# EAGLE board test4 (EAGLE 9.5.1)
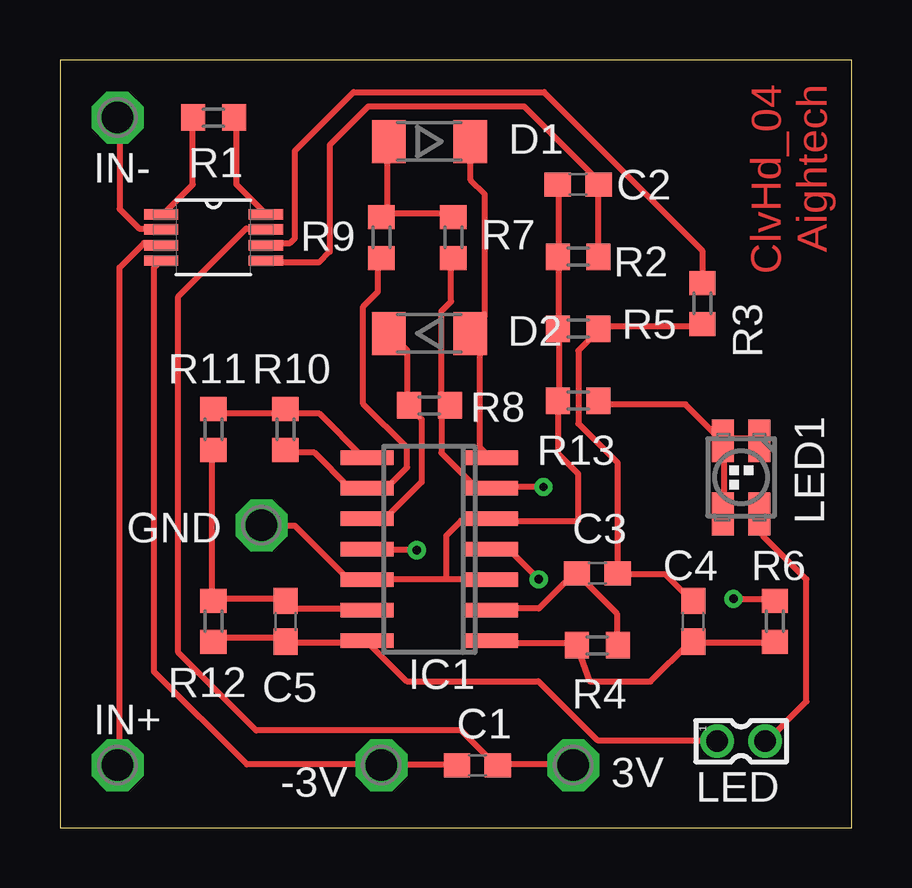
[diagram p0: board, top side]
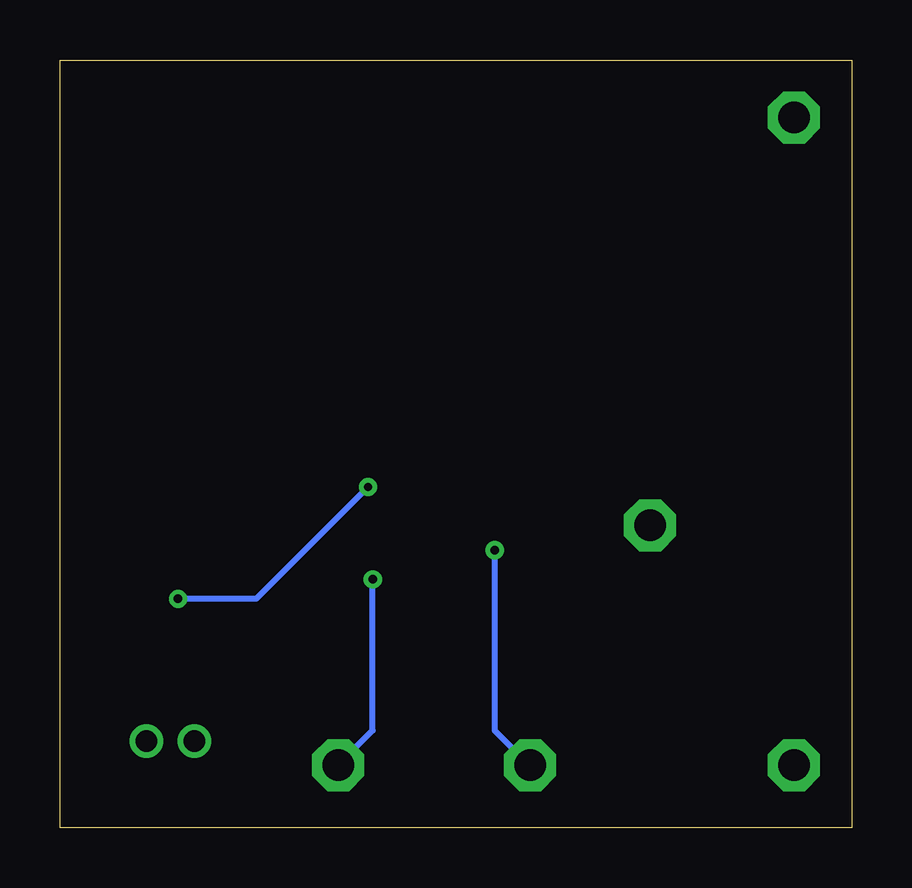
[diagram p1: board, bottom side, seen from below]

Size 33 x 32 mm. Coordinates in mm from the lower left corner, seen from the top.
Outline: 0,0 33,0 33,32 0,32 0,0
Copper layers (1*16): Top 0.035mm / dielectric 1.5mm / Bottom 0.035mm
Design rules "default *": minimum track width 10mil, minimum drill 0.35mm, track to track 6mil, track to pad 8mil, pad to pad 6mil, via to via 6mil, smd to smd 6mil, copper to edge 40mil, drill to drill 6mil, minimum pad ring 10mil, minimum via ring 8mil, stop-mask expansion 4mil, vias tented up to drill 0mil, thermal gap 10mil

## Footprints (pad centres in the part's own frame; a part is rotated, then mirrored left to right if it is on the bottom)
P1-13 = drill 1.321 pad 2.159 octagon: TP 0,0
C0603 = smd 1.1 x 1: 1 -0.85,0; 2 0.85,0
SOD80 = smd 1.4 x 1.8: 1 -1.7,0; 2 1.7,0
SO14 = smd 0.6 x 2.2: 1 -3.81,-2.6; 2 -2.54,-2.6; 3 -1.27,-2.6; 4 0,-2.6; 5 1.27,-2.6; 6 2.54,-2.6; 7 3.81,-2.6; 8 3.81,2.6; 9 2.54,2.6; 10 1.27,2.6; 11 0,2.6; 12 -1.27,2.6; 13 -2.54,2.6; 14 -3.81,2.6
332-02 = drill 0.9 pad 1.27: 1 0,-1; 2 0,1
P-LCC-4-3 = smd 0.914 x 1.778: 1 -0.762,-1.524; 2 -0.762,1.524; 3 0.762,1.524; 4 0.762,-1.524
SOP65P490X110-8N = smd 1.422 x 0.432: 1 -2.184,0.965; 2 -2.184,0.33; 3 -2.184,-0.33; 4 -2.184,-0.965; 5 2.184,-0.965; 6 2.184,-0.33; 7 2.184,0.33; 8 2.184,0.965
R0603 = smd 1 x 1.1: 1 -0.85,0; 2 0.85,0

## Placement (x,y rotation side)
3V  PTR1PAD1-13  [P1-13]  21.4,2.6 0 top
-3V  PTR1PAD1-13  [P1-13]  13.4,2.6 0 top
C1  0.1nF  [C0603]  17.4,2.6 180 top
C2  1nF  [C0603]  21.6,26.8 0 top
C3  0.1nF  [C0603]  22.4,10.6 0 top
C4  0.1nF  [C0603]  26.4,8.6 90 top
C5  0.1nF  [C0603]  9.4,8.6 270 top
D1  [SOD80]  15.4,28.6 180 top
D2  [SOD80]  15.4,20.6 0 top
GND  PTR1PAD1-13  [P1-13]  8.4,12.6 0 top
IC1  LMV324M  [SO14]  15.4,11.6 90 top
IN+  PTR1PAD1-13  [P1-13]  2.4,2.6 0 top
IN-  PTR1PAD1-13  [P1-13]  2.4,29.6 0 top
LED  332-02  [332-02]  28.4,3.6 270 top
LED1  [P-LCC-4-3]  28.4,14.6 180 top
PRECI_AMP  INA326  [SOP65P490X110-8N]  6.4,24.6 0 top
R1  100k  [R0603]  6.4,29.6 180 top
R2  100k  [R0603]  21.6,23.8 0 top
R3  100k  [R0603]  26.78,21.85 270 top
R4  100k  [R0603]  22.4,7.6 180 top
R5  100k  [R0603]  21.6,20.8 180 top
R6  100k  [R0603]  29.8,8.6 90 top
R7  100k  [R0603]  16.4,24.6 90 top
R8  100k  [R0603]  15.4,17.6 180 top
R9  100k  [R0603]  13.4,24.6 270 top
R10  100k  [R0603]  9.4,16.6 90 top
R11  100k  [R0603]  6.4,16.6 270 top
R12  100k  [R0603]  6.4,8.6 270 top
R13  100k  [R0603]  21.6,17.8 0 top

## Library data of the parts
3V -3V GND IN+ IN- = testpad
C1-C5 = rcl; SPICEPREFIX: C
D1 D2 = semicon-smd-ipc
IC1 = linear; SPICEPREFIX: J
LED = con-garry
LED1 = led
PRECI_AMP = INA326EA_250; DESCRIPTION: Precision, Low Drift, CMOS Instrumentation Amplifier 8-VSSOP -40 to 85; DIGI-KEY_PART_NUMBER: 296-15312-1-ND; DIGI-KEY_PURCHASE_URL: https://www.digikey.com/product-detail/en/texas-instruments/INA326EA-250/296-15312-1-ND/568254?utm_source=snapeda&utm_medium=aggregator&utm_campaign=symbol; MF: Texas Instruments; MP: INA326; PACKAGE: MSOP-8 Texas Instruments
R1-R13 = rcl; SPICEPREFIX: R

## Nets
GNDA: C2.1 GND.TP IC1.3 IC1.5 IC1.12 R2.1 R5.2 R13.1
N$1: PRECI_AMP.1 R1.2
N$2: PRECI_AMP.8 R1.1
N$3: IN+.TP PRECI_AMP.3
N$4: C2.2 PRECI_AMP.5 R2.2
N$5: IN-.TP PRECI_AMP.2
N$6: C3.1 IC1.2 R4.1
N$7: C3.2 C4.2 R3.2 R5.1
N$8: C5.1 IC1.13 R11.2 R12.1
N$9: PRECI_AMP.6 R3.1
N$10: IC1.6 R6.2 R7.1 R8.1
N$11: D2.1 IC1.10 R8.2
N$12: IC1.9 R9.2 R10.1
N$13: D1.1 D2.2 IC1.7
N$14: D1.2 R7.2 R9.1
N$15: IC1.8 R10.2 R11.1
N$16: C5.2 IC1.14 LED.1 R12.2
N$17: LED1.1 LED1.3 LED1.4 R13.2
N$20: LED1.2 LED.2
N$23: C4.1 IC1.1 R4.2 R6.1
V+: 3V.TP C1.1 IC1.4 PRECI_AMP.7
V-: -3V.TP C1.2 IC1.11 PRECI_AMP.4

## Tracks (layer width: path | path; a pad name or v marks a point on that pad's centre or on a via)
GNDA
  Top 0.254: C2.1 20.8,26.79 20.8,23.94 R2.1 20.8,23.74 20.8,20.89 R5.2 20.8,20.69 20.8,17.85 R13.1 20.75,15.6 21.6,14.75 21.6,12.79 18.13,12.79 IC1.5 17.93,12.79 16.72,12.79 16.11,12.17 16.11,10.35 | 16.11,10.35 17.93,10.35 IC1.3 | 16.11,10.35 12.85,10.35 IC1.12 12.64,10.35 12.04,10.35 9.8,12.58 8.58,12.58 GND.TP
N$1
  Top 0.254: R1.2 5.53,29.45 5.53,26.81 4.31,25.59 PRECI_AMP.1
N$2
  Top 0.254: R1.1 7.36,29.45 7.36,26.81 8.58,25.59 PRECI_AMP.8
N$3
  Top 0.254: PRECI_AMP.3 4.11,24.37 3.5,24.37 2.48,23.35 2.48,2.63 IN+.TP
N$4
  Top 0.254: R2.2 22.43,23.94 22.43,26.79 C2.2 22.43,26.99 19.36,30.05 12.85,30.05 11.24,28.45 11.24,24.01 10.79,23.55 8.78,23.55 PRECI_AMP.5
N$5
  Top 0.254: PRECI_AMP.2 4.11,24.98 3.3,24.98 2.48,25.79 2.48,29.45 IN-.TP
N$6
  Top 0.254: R4.1 23.21,7.71 23.21,8.93 21.59,10.55 C3.1 21.38,10.55 19.96,9.13 18.13,9.13 IC1.2
N$7
  Top 0.254: C4.2 26.26,9.53 25.24,10.55 23.41,10.55 C3.2 23.25,15.2 21.61,16.84 21.61,19.88 22.43,20.69 R5.1 22.63,20.89 26.87,20.89 R3.2
N$8
  Top 0.254: R11.2 6.35,15.63 6.35,9.53 R12.1 6.55,9.53 9.39,9.53 C5.1 9.6,9.33 9.8,9.13 12.64,9.13 IC1.13
N$9
  Top 0.254: R3.1 26.78,24.06 20.18,30.66 12.24,30.66 9.8,28.22 9.8,24.57 9.6,24.37 8.78,24.37 PRECI_AMP.6
N$10  (via drill 0.35)
  Top 0.254: R7.1 16.3,23.55 16.3,21.93 15.9,21.52 15.9,17.87 16.1,17.66 R8.1 15.9,17.25 15.9,15.62 17.32,14.21 17.93,14.21 IC1.6 18.13,14.01 18.32,14.2 v20.16,14.2 | v28.08,9.53 29.71,9.53 R6.2
  Bottom 0.254: v28.08,9.53 24.82,9.53 v20.16,14.2
N$11
  Top 0.254: D2.1 13.86,20.51 14.47,19.9 14.47,17.66 R8.2 15.08,17.02 15.08,14.4 13.66,12.99 12.85,12.99 IC1.10
N$12
  Top 0.254: R10.1 9.6,15.63 10.61,15.63 12.04,14.21 12.64,14.21 IC1.9 12.85,14.21 13.66,14.21 14.47,15.02 14.47,15.83 12.64,17.66 12.64,21.73 13.25,22.34 13.25,23.55 R9.2
N$13
  Top 0.254: IC1.7 17.93,15.43 17.52,15.84 17.52,20.18 D2.2 17.11,20.71 17.72,21.31 17.72,26.4 17.11,27 17.11,28.43 D1.1
N$14
  Top 0.254: 13.66,25.59 16.3,25.59 R7.2 | 13.66,25.59 13.46,25.59 R9.1 13.66,25.59 | 13.66,25.59 13.66,28.43 D1.2
N$15
  Top 0.254: R11.1 6.59,17.26 9.21,17.26 R10.2 9.6,17.26 10.82,17.26 12.64,15.43 IC1.8
N$16
  Top 0.254: R12.2 6.55,7.91 9.39,7.91 C5.2 9.6,7.71 12.64,7.71 IC1.14 12.85,7.71 14.46,6.1 19.94,6.1 22.4,3.64 27.27,3.64 LED.1
N$17
  Top 0.254: R13.2 22.63,17.64 26.07,17.64 27.48,16.24 LED1.4 | LED1.3 27.68,13.19 27.68,16.04 LED1.4 | LED1.1 29.1,16.24 27.68,16.24 LED1.4
N$20
  Top 0.254: LED1.2 29.31,12.99 29.31,12.16 31.12,10.34 31.12,5.25 29.51,3.64 LED.2
N$23
  Top 0.254: R6.1 29.71,7.71 26.46,7.71 C4.1 26.26,7.71 26.24,7.71 24.62,6.09 22.1,6.09 R4.2 21.38,7.71 18.13,7.71 IC1.1
V+  (via drill 0.35)
  Top 0.254: 3V.TP 21.38,2.63 18.33,2.63 C1.1 18.13,2.63 16.71,4.05 8.18,4.05 4.93,7.3 4.93,22.14 7.77,24.98 8.58,24.98 PRECI_AMP.7 | v19.96,10.35 18.74,11.57 18.13,11.57 IC1.4
  Bottom 0.254: v19.96,10.35 19.96,4.05 21.38,2.63 3V.TP
V-  (via drill 0.35)
  Top 0.254: C1.2 16.51,2.63 13.46,2.63 -3V.TP 13.25,2.63 7.79,2.63 3.91,6.51 3.91,23.33 PRECI_AMP.4 | v14.87,11.56 v14.87,11.57 12.85,11.57 IC1.11
  Bottom 0.254: v14.87,11.56 14.87,4.04 13.46,2.63 -3V.TP

## Text on the board
Top: ClvHd_04 / Aightech